# EAGLE board Dashboard Test rev0 (EAGLE 7.6.0)
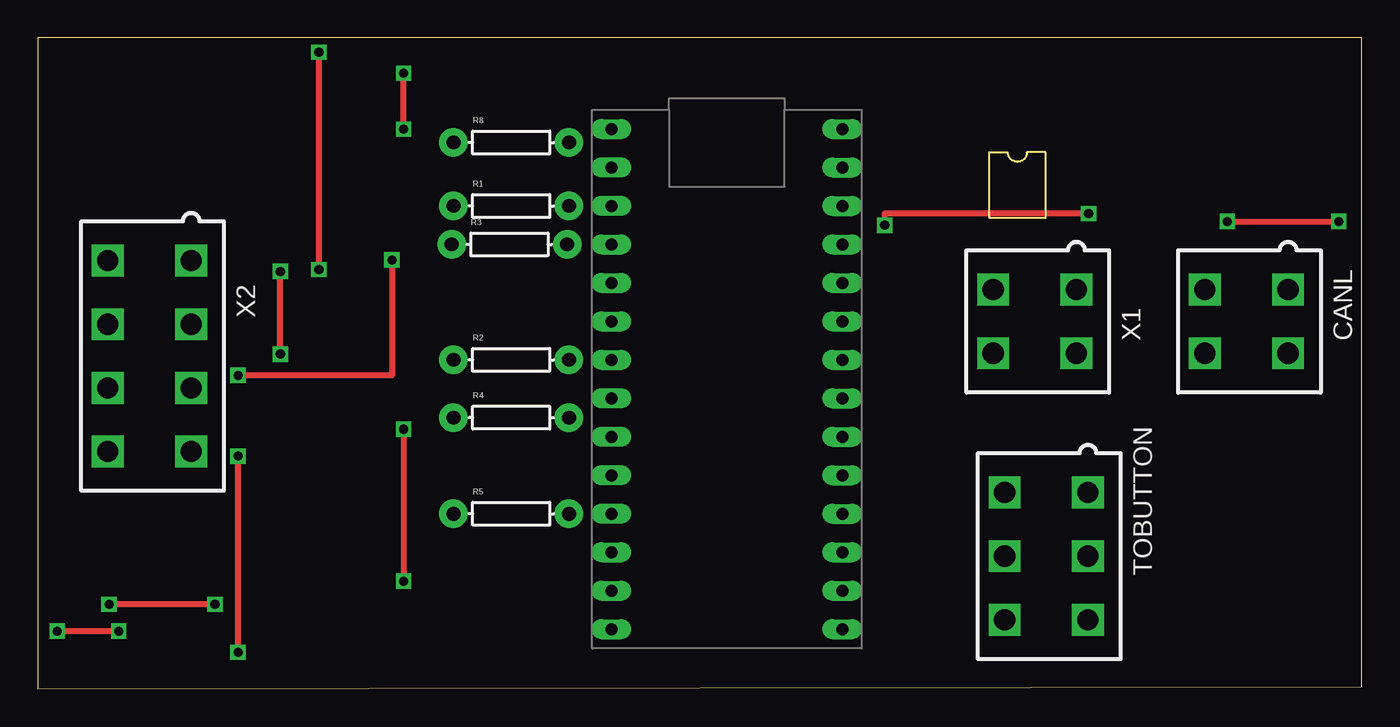
[diagram p0: board, top side]
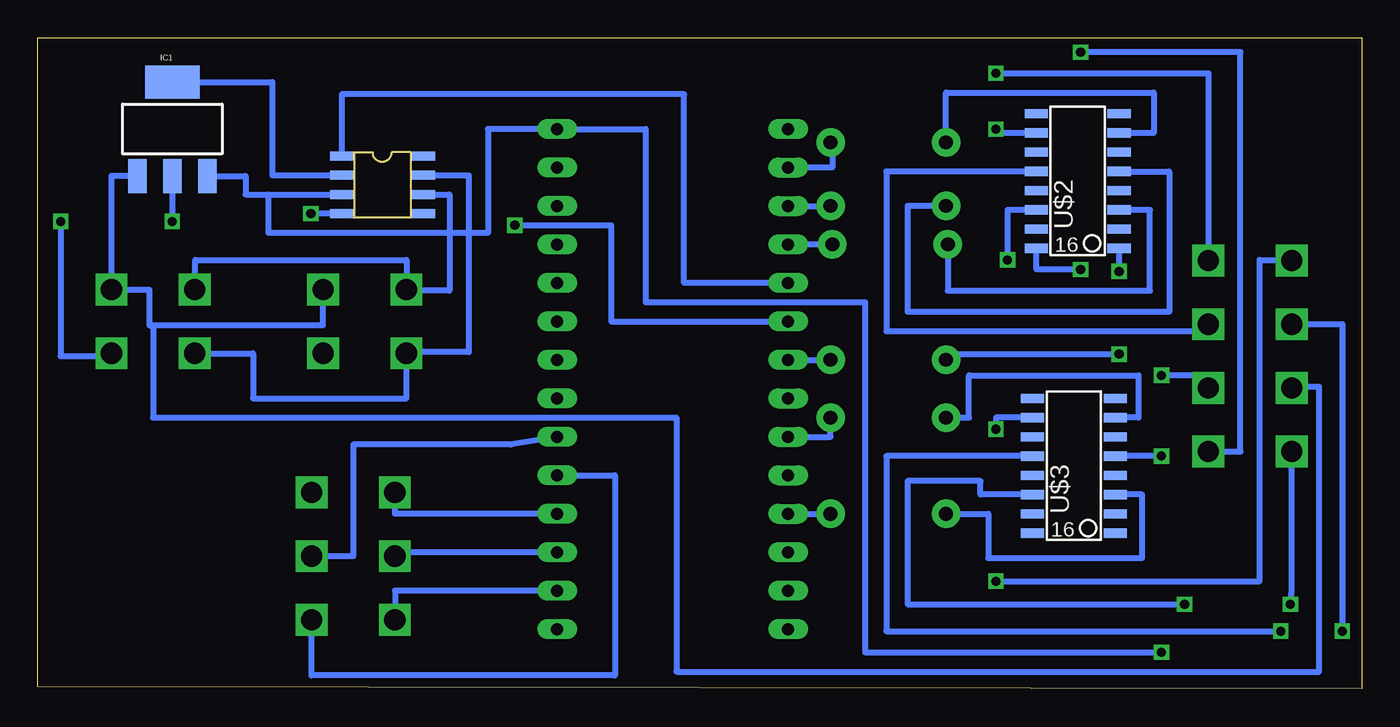
[diagram p1: board, bottom side, seen from below]

Size 87.36 x 42.98 mm. Coordinates in mm from the lower left corner, seen from the top.
Outline: 0,0 87.36,0.13 87.36,42.98 0,42.98 0,0
Copper layers (1*16): Top 0.035mm / dielectric 1.5mm / Bottom 0.035mm
Design rules "default": minimum track width 10mil, minimum drill 24mil, track to track 8mil, track to pad 8mil, pad to pad 8mil, via to via 8mil, smd to smd 8mil, copper to edge 40mil, drill to drill 8mil, minimum pad ring 10mil, minimum via ring 8mil, stop-mask expansion 4mil, vias tented up to drill 0mil, thermal gap 10mil

## Footprints (pad centres in the part's own frame; a part is rotated, then mirrored left to right if it is on the bottom)
SOIC08 = smd 0.6 x 1.55: 1 0,0; 2 1.27,0; 3 2.54,0; 4 3.81,0; 5 3.81,5.4; 6 2.54,5.4; 7 1.27,5.4; 8 0,5.4
MINIFIT_5566-4 = drill 1.4 square: 1 2.1,-2.75; 2 -2.1,-2.75; 3 2.1,2.75; 4 -2.1,2.75
SOT223 = smd 1.219 x 2.235: 1 -2.311,-3.099; 2 0,-3.099; 3 2.311,-3.099 | smd 3.6 x 2.2: 4 0,3.099
AXIAL-0.3 = drill 0.9 pad 1.88: P$1 -3.81,0; P$2 3.81,0
MINIFIT_5566-6 = drill 1.4 square: 1 4.2,-2.75; 2 0,-2.75; 3 -4.2,-2.75; 4 4.2,2.75; 5 0,2.75; 6 -4.2,2.75
TEENSY_3.2_SIMPLE = drill 0.8 long: 3.3V 16.51,29.21; A0 16.51,3.81; A1 16.51,6.35; A2 16.51,8.89; A3 16.51,11.43; A4 16.51,13.97; A5 16.51,16.51; A6 16.51,19.05; A7 16.51,21.59; A8 16.51,24.13; A9 16.51,26.67; AGND 16.51,31.75; D0(RX1) 1.27,31.75; D1(TX1) 1.27,29.21; D2 1.27,26.67; D3(CANTX) 1.27,24.13; D4(CANRX) 1.27,21.59; D5 1.27,19.05; D6 1.27,16.51; D7(RX3) 1.27,13.97; D8(TX3) 1.27,11.43; D9(RX2) 1.27,8.89; D10(TX2) 1.27,6.35; D11 1.27,3.81; D12 1.27,1.27; D13 16.51,1.27; GND 1.27,34.29; VIN 16.51,34.29
SO-16 = smd 0.61 x 1.524: 1 -4.445,-2.794; 2 -3.175,-2.794; 3 -1.905,-2.794; 4 -0.635,-2.794; 5 0.635,-2.794; 6 1.905,-2.794; 7 3.175,-2.794; 8 4.445,-2.794; 9 4.445,2.667; 10 3.175,2.667; 11 1.905,2.667; 12 0.635,2.667; 13 -0.635,2.667; 14 -1.905,2.667; 15 -3.175,2.667; 16 -4.445,2.667
SOIC-16 = smd 0.61 x 1.524: 1 -4.445,-2.794; 2 -3.175,-2.794; 3 -1.905,-2.794; 4 -0.635,-2.794; 5 0.635,-2.794; 6 1.905,-2.794; 7 3.175,-2.794; 8 4.445,-2.794; 9 4.445,2.667; 10 3.175,2.667; 11 1.905,2.667; 12 0.635,2.667; 13 -0.635,2.667; 14 -1.905,2.667; 15 -3.175,2.667; 16 -4.445,2.667
MINIFIT_5566-8 = drill 1.4 square: 1 6.3,-2.75; 2 2.1,-2.75; 3 -2.1,-2.75; 4 -6.3,-2.75; 5 6.3,2.75; 6 2.1,2.75; 7 -2.1,2.75; 8 -6.3,2.75

## Placement (x,y rotation side)
CAN  MCP2551SOIC  [SOIC08]  67.31,35.18 270 bottom
CANL  MINIFIT_5566-4  [MINIFIT_5566-4]  79.76,24.26 90 top
IC1  [SOT223]  78.49,36.96 0 bottom
R1  [AXIAL-0.3]  31.24,31.88 0 top
R2  [AXIAL-0.3]  31.24,21.72 0 top
R3  [AXIAL-0.3]  31.11,29.34 0 top
R4  [AXIAL-0.3]  31.24,17.91 0 top
R5  [AXIAL-0.3]  31.24,11.56 0 top
R8  [AXIAL-0.3]  31.24,36.07 0 top
TOBUTTON  MINIFIT_5566-6  [MINIFIT_5566-6]  66.55,8.76 90 top
U$1  TEENSY_3.2_SIMPLE  [TEENSY_3.2_SIMPLE]  36.58,2.67 0 top
U$2  OPTOCOUPLER_QUAD_TLP291-4  [SO-16]  18.8,33.53 90 bottom
U$3  TLP291-4  [SOIC-16]  19.05,14.73 90 bottom
X1  MINIFIT_5566-4  [MINIFIT_5566-4]  65.79,24.26 90 top
X2  MINIFIT_5566-8  [MINIFIT_5566-8]  7.37,21.97 90 top

## Library data of the parts
CAN IC1 R1-R5 R8 U$1-U$3 = HyTechDevices
CANL X1 X2 = HyTechDevices; OC_FARNELL: unknown; OC_NEWARK: unknown
TOBUTTON = HyTechDevices; MPN: 95566-61002; OC_FARNELL: unknown; OC_NEWARK: 22K8620

## Nets
12VSUPPLY: CANL.1 IC1.1 X1.1 X2.7
BOOST: TOBUTTON.3 U$1.A3
BUZZER: U$3.14 X2.8
CANH: CAN.6 CANL.3 X1.3
CANL: CAN.7 CANL.4 X1.4
GND: CAN.2 CAN.8 CANL.2 IC1.2 IC1.4 U$1.GND U$2.2 U$2.4 U$2.6 U$2.8 U$2.9 U$2.11 U$2.13 U$2.15 U$3.2 U$3.4 U$3.6 U$3.8 U$3.9 U$3.11 U$3.13 U$3.15 X1.2
LED_BMS: U$3.12 X2.6
LED_BOOST: U$2.12 X2.2
LED_BSPD: U$2.16 X2.4
LED_IMD: U$3.10 X2.5
LED_MARK: U$2.10 X2.1
LED_START: U$2.14 X2.3
MARK: TOBUTTON.2 U$1.A4
N$1: R3.P$2 U$1.D2
N$2: CAN.1 U$1.D3(CANTX)
N$3: CAN.4 U$1.D4(CANRX)
N$4: R3.P$1 U$2.3
N$5: R1.P$2 U$1.D1(TX1)
N$7: R4.P$1 U$3.7
N$8: R2.P$1 U$2.1
N$9: R1.P$1 U$2.5
N$10: R8.P$2 U$1.D0(RX1)
N$11: R8.P$1 U$2.7
N$12: R2.P$2 U$1.D5
N$13: R4.P$2 U$1.D7(RX3)
N$14: R5.P$2 U$1.D9(RX2)
N$19: CAN.3 IC1.3 U$1.VIN U$3.5
N$22: R5.P$1 U$3.3
SELECT: TOBUTTON.6 U$1.A0
START: TOBUTTON.4 U$1.A2
TOGGLE: TOBUTTON.5 U$1.A1

## Tracks (layer width: path | path; a pad name or v marks a point on that pad's centre or on a via)
12VSUPPLY
  Bottom 0.406: IC1.1 82.51,33.86 CANL.1 80.01,26.36 80.01,24 79.76,24 | X1.1 68.54,24 79.76,24 | 79.76,24 79.76,17.91 45.21,17.91 45.21,1.14 2.79,1.14 2.79,19.94 4.62,19.94 X2.7
BOOST
  Bottom 0.406: U$1.A3 49.28,14.1 49.28,0.89 69.3,0.89 TOBUTTON.3
BUZZER  (via drill 0.6)
  Top 0.406: v11.68,5.59 v4.7,5.59
  Bottom 0.406: v11.68,5.59 29.97,5.59 29.97,13.72 25.15,13.72 25.15,12.83 U$3.14 | v4.7,5.59 4.62,6.48 X2.8
CANH
  Bottom 0.406: CANL.3 76.96,26.36 76.96,28.32 63.04,28.32 X1.3 63.04,26.29 60.2,26.29 60.2,32.64 CAN.6
CANL
  Bottom 0.406: CANL.4 73.15,22.16 73.15,19.18 63.04,19.18 X1.4 63.04,22.23 58.93,22.23 58.93,33.91 CAN.7
GND  (via drill 0.6)
  Top 0.406: v78.49,30.86 v85.85,30.86
  Bottom 0.406: IC1.2 v78.49,30.86 | v85.85,30.86 85.85,21.97 82.51,21.97 CANL.2 | IC1.4 71.88,40.06 71.88,33.91 CAN.2
  cutout Top: -0.76,44.2 -1.02,-1.14 88.9,-1.14 88.65,43.56
  cutout Bottom: -2.03,44.7 -2.29,-2.16 89.92,-2.16 89.92,44.83
LED_BMS  (via drill 0.6)
  Top 0.406: v5.33,3.81 v1.27,3.81
  Bottom 0.406: U$3.12 31.37,15.37 31.37,3.81 v5.33,3.81 | X2.6 1.27,24.07 v1.27,3.81
LED_BOOST
  Bottom 0.406: U$2.12 31.37,34.16 31.37,23.62 10.12,23.62 X2.2
LED_BSPD  (via drill 0.6)
  Top 0.406: v18.54,42.04 v18.54,27.69
  Bottom 0.406: X2.4 8,15.67 8,42.04 v18.54,42.04 | v18.54,27.69 21.46,27.69 U$2.16
LED_IMD  (via drill 0.6)
  Top 0.406: v24.13,17.15 v24.13,7.11
  Bottom 0.406: U$3.10 24.13,17.91 v24.13,17.15 | v24.13,7.11 6.73,7.11 6.73,28.32 4.74,28.32 X2.5
LED_MARK  (via drill 0.6)
  Top 0.406: v24.13,36.96 v24.13,40.64
  Bottom 0.406: U$2.10 24.13,36.7 v24.13,36.96 | v24.13,40.64 10.12,40.64 X2.1
LED_START  (via drill 0.6)
  Top 0.406: v23.37,28.32 23.37,20.7 v13.21,20.7
  Bottom 0.406: U$2.14 23.37,31.62 v23.37,28.32 | X2.3 10.12,19.94 10.16,19.94 10.16,20.7 v13.21,20.7
MARK
  Bottom 0.406: U$1.A4 56.13,16.13 66.55,16.13 66.55,8.76 TOBUTTON.2
N$1
  Bottom 0.406: R3.P$2 U$1.D2
N$2
  Bottom 0.406: U$1.D3(CANTX) 44.7,26.8 44.7,39.24 67.31,39.24 CAN.1
N$3  (via drill 0.6)
  Top 0.406: v69.34,31.37 55.88,31.37 v55.88,30.61
  Bottom 0.406: CAN.4 v69.34,31.37 | v55.88,30.61 49.53,30.61 49.53,24.26 U$1.D4(CANRX)
N$4
  Bottom 0.406: R3.P$1 27.31,26.29 13.97,26.29 13.97,31.62 U$2.3
N$5
  Bottom 0.406: U$1.D1(TX1) R1.P$2
N$7
  Bottom 0.406: R4.P$1 25.91,17.91 25.91,20.7 14.73,20.7 14.73,17.91 U$3.7
N$8  (via drill 0.6)
  Top 0.406: v16,22.1 v16,27.56
  Bottom 0.406: R2.P$1 27.43,22.1 v16,22.1 | v16,27.56 U$2.1
N$9
  Bottom 0.406: U$2.5 12.7,34.16 12.7,24.89 29.97,24.89 29.97,31.88 R1.P$1
N$10
  Bottom 0.406: R8.P$2 34.92,36.07 34.92,34.42 U$1.D0(RX1)
N$11
  Bottom 0.406: R8.P$1 27.43,39.37 13.72,39.37 13.72,36.7 U$2.7
N$12
  Bottom 0.406: U$1.D5 R2.P$2
N$13
  Bottom 0.406: U$1.D7(RX3) 35.05,16.64 R4.P$2
N$14
  Bottom 0.406: U$1.D9(RX2) R5.P$2
N$19  (via drill 0.6)
  Top 0.406: v13.21,2.41 v13.21,15.37
  Bottom 0.406: IC1.3 73.66,33.86 73.66,32.64 72.14,32.64 | 72.14,32.64 CAN.3 | 72.14,32.64 72.14,30.1 57.66,30.1 57.66,36.96 U$1.VIN 47.24,36.96 47.24,25.53 32.77,25.53 32.77,2.41 v13.21,2.41 | v13.21,15.37 U$3.5
N$22
  Bottom 0.406: R5.P$1 24.64,11.56 24.64,8.64 14.48,8.64 14.48,12.83 U$3.3
SELECT
  Bottom 0.406: U$1.A0 63.8,6.48 TOBUTTON.6
START
  Bottom 0.406: U$1.A2 63.8,11.56 TOBUTTON.4
TOGGLE
  Bottom 0.406: U$1.A1 63.8,9.02 TOBUTTON.5